# Altium PCB ACS_2.PcbDoc
Units mm, origin at the board's own origin, x right, y up, seen from the top; angles counter-clockwise.
Board outline 90.17 x 95.89 mm, 4 copper layers (Top Layer, Signal Layer 1, Internal Plane 3, Bottom Layer), stack 1.568 mm thick; 51 components, 46 nets, 340 pads, 42 vias.
Unrouted connection lines stored in the file: 6.
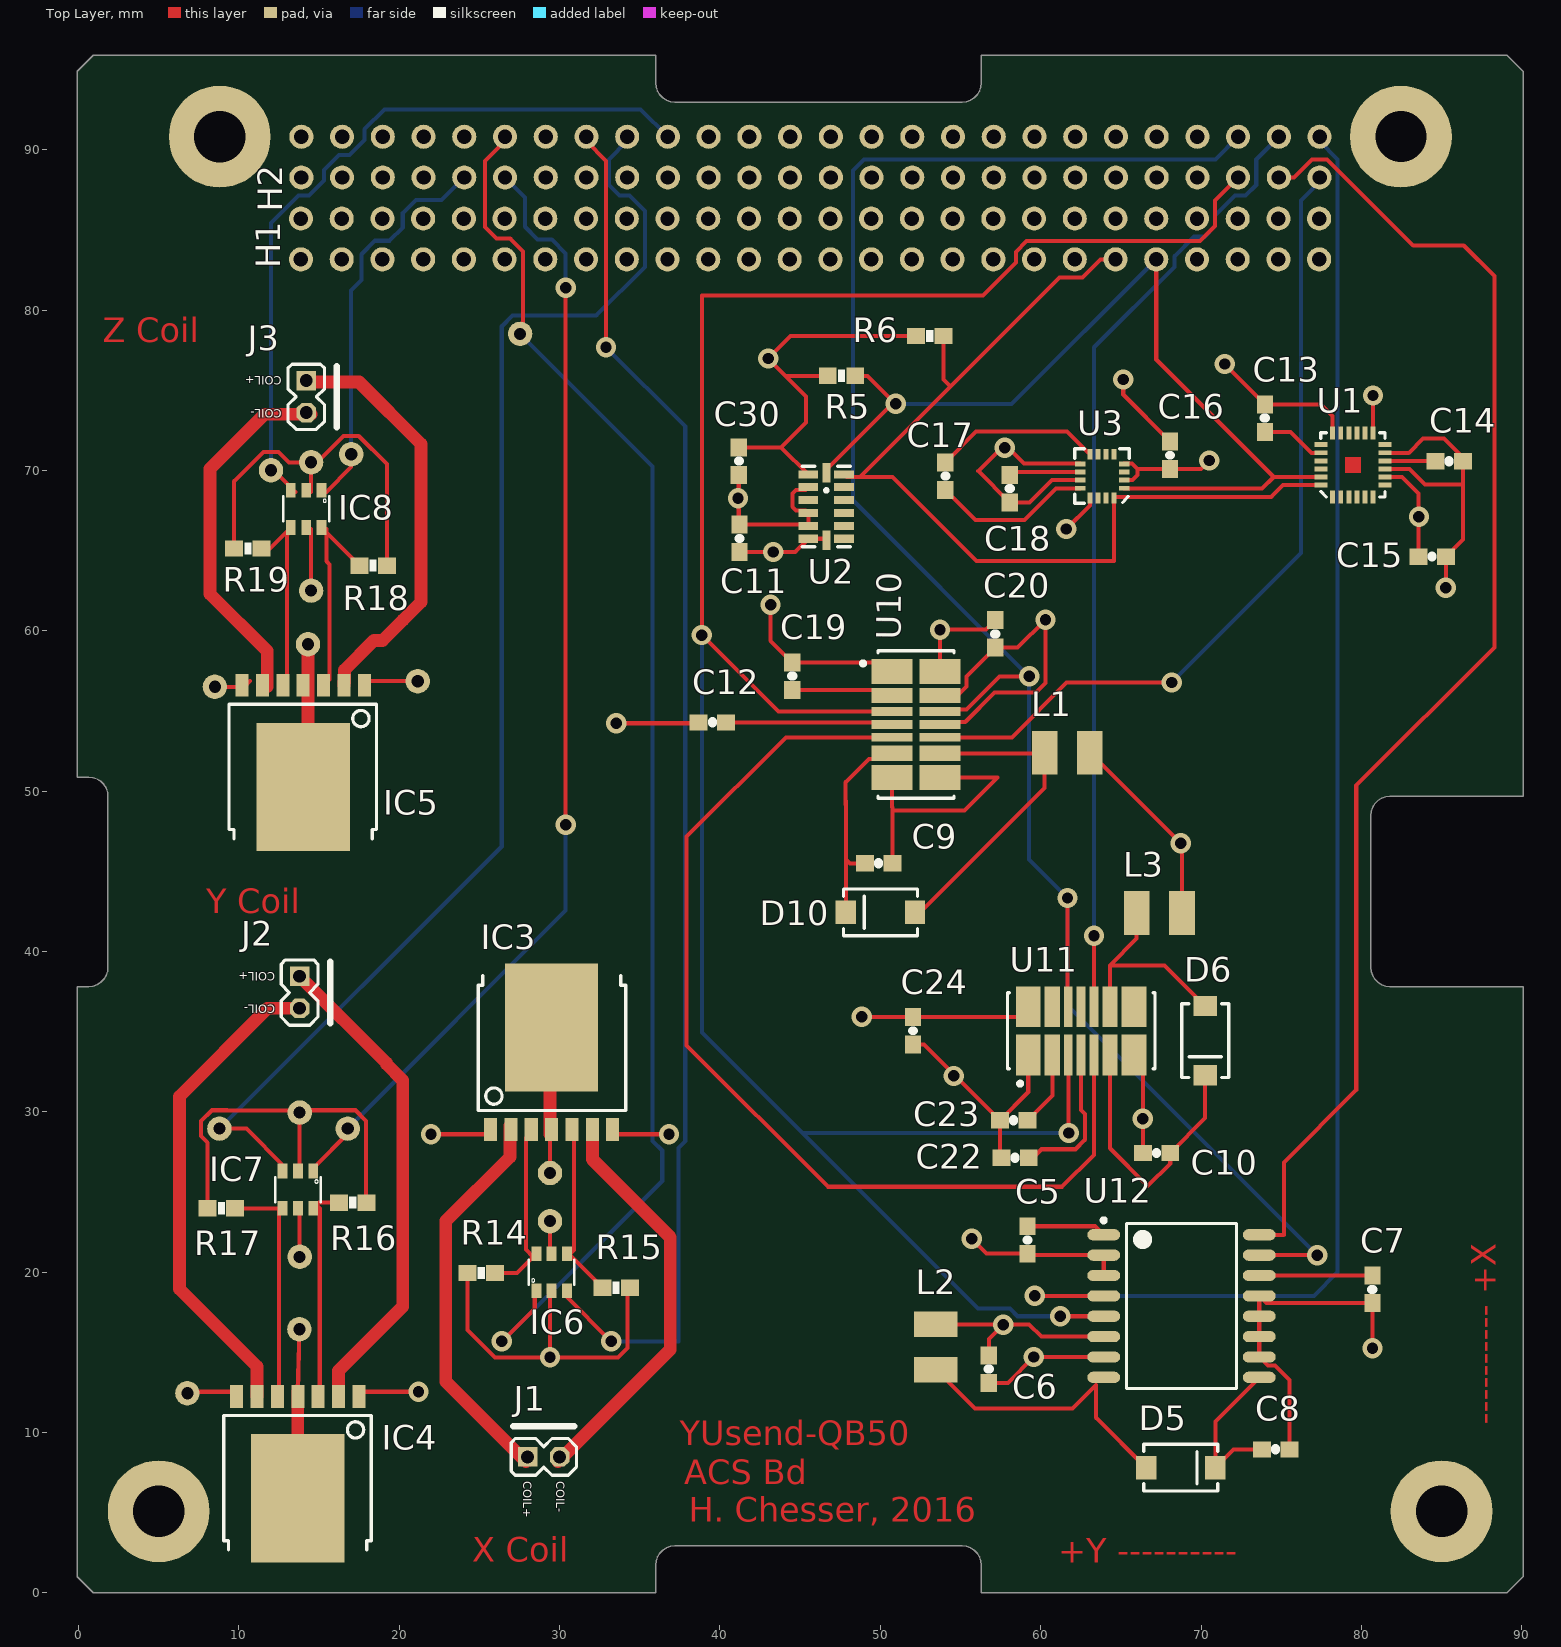
[diagram p0: Top Layer view]
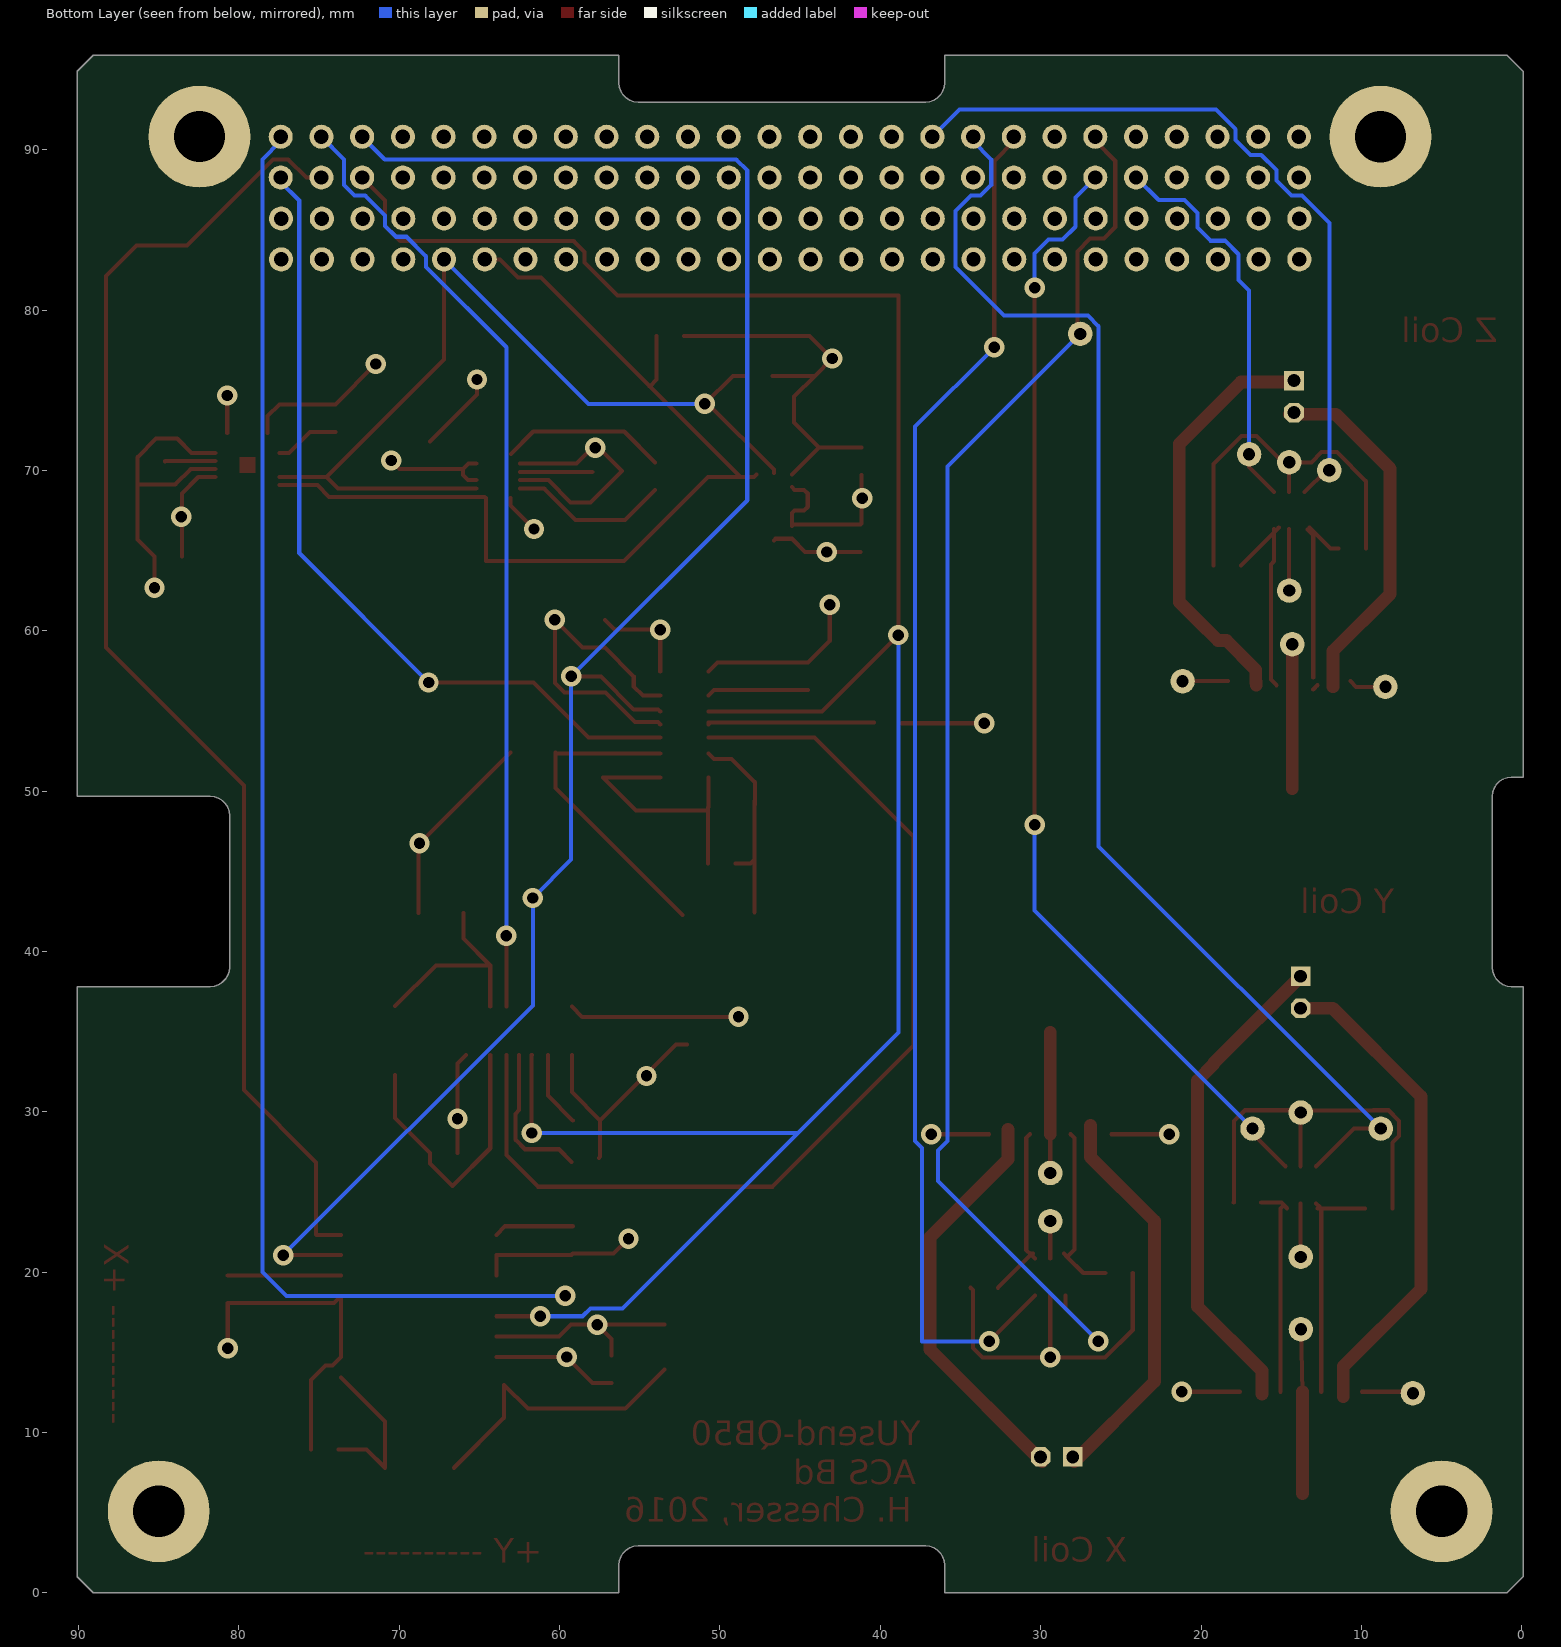
[diagram p1: Bottom Layer view, seen from below]
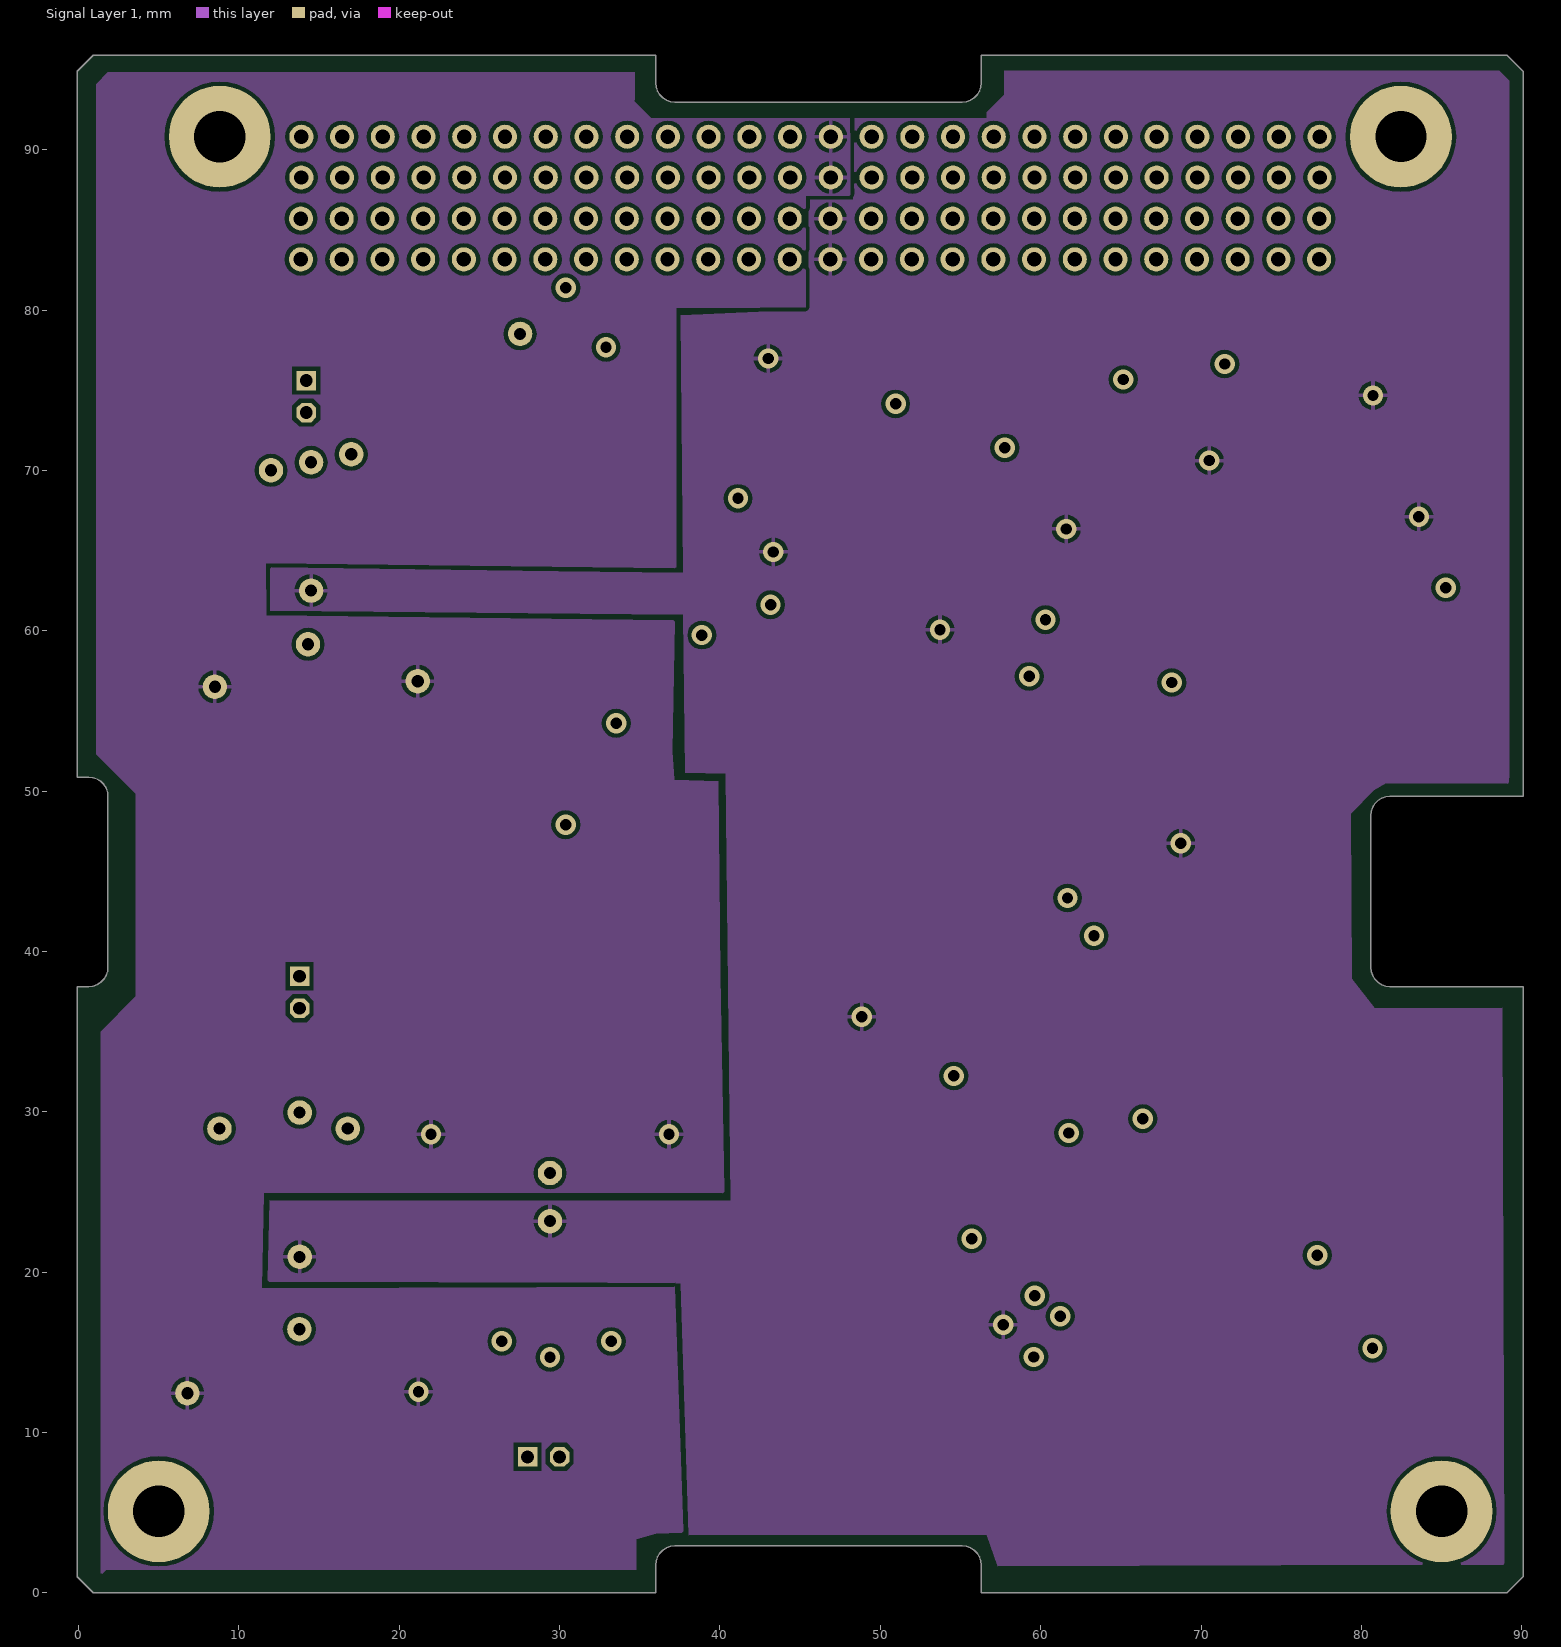
[diagram p2: Signal Layer 1]
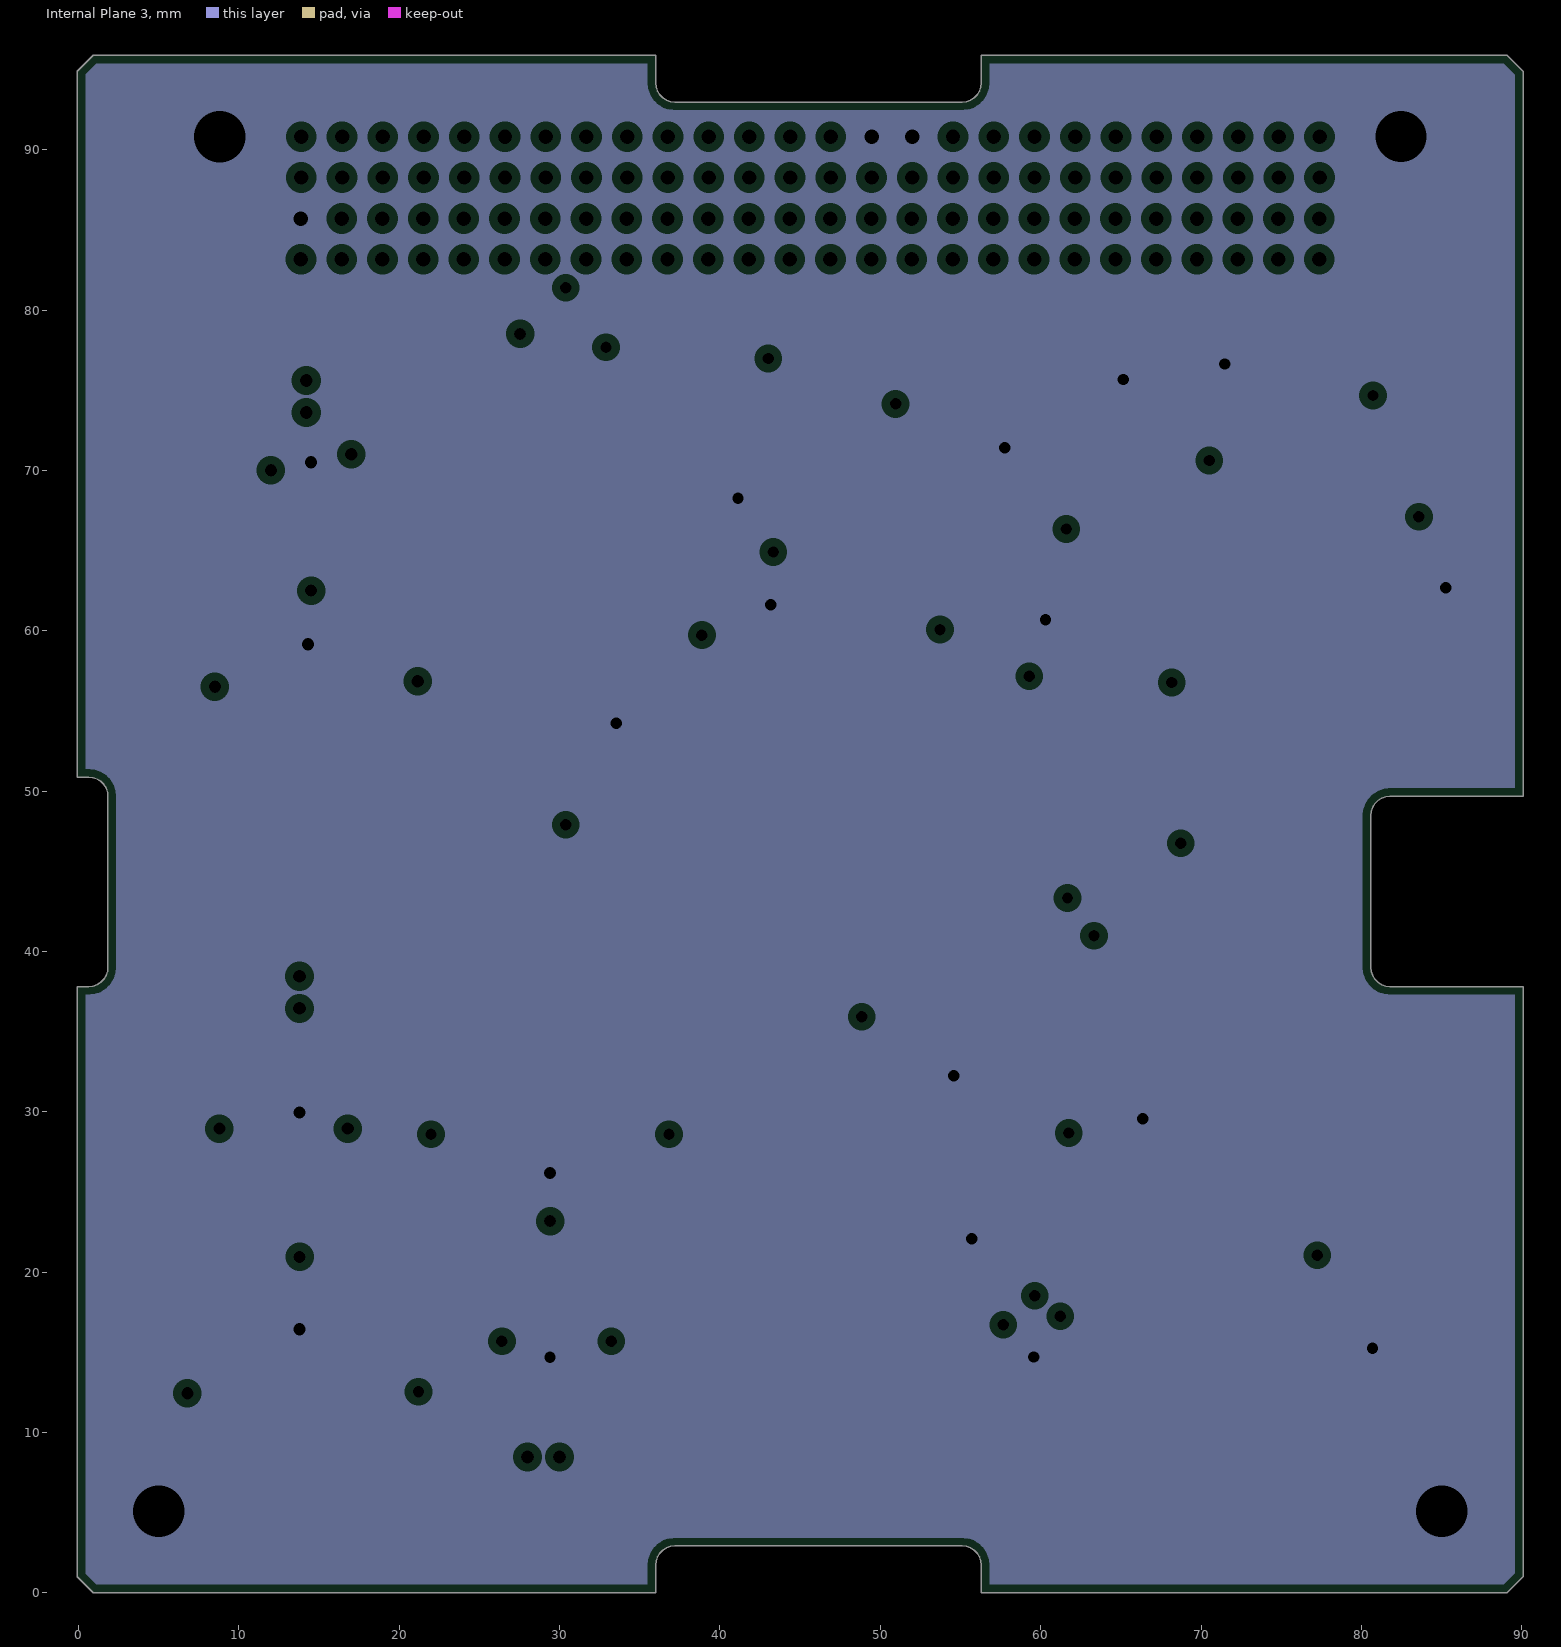
[diagram p3: Internal Plane 3, clearances drawn from the general rule]

## Layer stack, top to bottom
Top Solder: solder mask 0.0102, Solder Resist, Dk 3.5
Top Layer: signal copper 0.0356
Dielectric 1: core 0.475, FR-4, Dk 4.2
Signal Layer 1: signal copper 0.036
Dielectric 3: core 0.475, FR-4, Dk 4.2
Internal Plane 3: plane copper 0.036, net GND
Dielectric 2: core 0.475, FR-4, Dk 4.2
Bottom Layer: signal copper 0.0356
Bottom Solder: solder mask 0.0102, Solder Resist, Dk 3.5

## Board outline
89.085,95.89 56.305,95.89 56.305,94.17 56.275,93.903 56.186,93.649 56.043,93.422 55.853,93.232 55.626,93.089 55.372,93 55.105,92.97 37.185,92.97 36.918,93 36.664,93.089 36.437,93.232 36.247,93.422 36.104,93.649 36.015,93.903 35.985,94.17 35.985,95.89 0.915,95.89 -0.085,94.89 -0.085,50.87 0.635,50.87 0.902,50.84 1.156,50.751 1.383,50.608 1.573,50.418 1.716,50.191 1.805,49.937 1.835,49.67 1.835,39.01 1.805,38.743 1.716,38.489 1.573,38.262 1.383,38.072 1.156,37.929 0.902,37.84 0.635,37.81 -0.085,37.81 -0.085,1 0.915,0 35.985,0 35.985,1.72 36.015,1.987 36.104,2.241 36.247,2.468 36.437,2.658 36.664,2.801 36.918,2.89 37.185,2.92 55.105,2.92 55.372,2.89 55.626,2.801 55.853,2.658 56.043,2.468 56.186,2.241 56.275,1.987 56.305,1.72 56.305,0 89.085,0 90.085,1 90.085,37.81 81.785,37.81 81.518,37.84 81.264,37.929 81.037,38.072 80.847,38.262 80.704,38.489 80.615,38.743 80.585,39.01 80.585,48.47 80.615,48.737 80.704,48.991 80.847,49.218 81.037,49.408 81.264,49.551 81.518,49.64 81.785,49.67 90.085,49.67 90.085,94.89

## Design rules (kind name [scope] priority, off if disabled: settings)
Clearance [All] p1: gap=0.254
PlaneClearance [All] p1: clearance=0.508
PlaneConnect [All] p1: planeconnectstyle=Relief reliefexpansion=0.508 reliefentries=4 reliefconductorwidth=0.254 reliefairgap=0.254
PolygonConnect [All] p1: connectstyle=Relief reliefconductorwidth=0.254 reliefentries=4 polygonreliefangle="90 Angle" airgapwidth=0.254
RoutingVias [All] p1: holewidth=0.711 width=1.27 viastyle="Through Hole" minholewidth=0.711 minwidth=1.27 maxholewidth=0.711 maxwidth=1.27
SolderMaskExpansion [All] p1: expansion=0.102
Width GroundTrace [All] p1: maxlimit=0.254 minlimit=0.254 preferedwidth=0.254
Width CoilTraces [(InNet('DRIVE-XA') OR InNet('DRIVE-XB') OR InNet('DRIVE-YA') OR InNet('DRIVE-YB') OR InNet('DRIVE-ZA') OR InNet('DRIVE-ZB'))] p2: maxlimit=1 minlimit=0.254 preferedwidth=0.8 toplayer_minwidth=0.5 midlayer1_maxwidth=0.254 midlayer1_prefwidth=0.254 bottomlayer_minwidth=0.5 minimp=50.000000 maximp=50.000000 favimp=50.000000
Width [InNet('GND')] p3: maxlimit=0.5 minlimit=0.254 preferedwidth=0.4 midlayer1_maxwidth=0.254 midlayer1_prefwidth=0.254 minimp=50.000000 maximp=50.000000 favimp=50.000000
Width PowerTraces [(InNet('3.3V') AND InNet('5V'))] p4: maxlimit=0.5 minlimit=0.254 preferedwidth=0.4 midlayer1_maxwidth=0.254 midlayer1_prefwidth=0.254 minimp=50.000000 maximp=50.000000 favimp=50.000000
27 further rules are at their usual default settings.

## Classes and differential pairs
net class DIR[2..0]: DIR0 DIR1 DIR2
net class I2C(TWI)[1..0]: I2C(TWI)0 I2C(TWI)1
net class PWM[2..0]: PWM0 PWM1 PWM2

## Components (designator, comment, footprint, x,y, rotation, side; value= is the part's Value field where it differs from the comment)
C5 "1uF" 0603-CAP 59.182,21.996 r90 top
C6 "1uF" 0603-CAP 56.769,13.945 r90 top
C7 "1uF" 0603-CAP 80.696,18.923 r90 top
C8 "100nF" 0603-CAP 74.651,8.941 r0 top
C9 "100nF" 0603-CAP 49.886,45.491 r0 top
C10 "100nF" 0603-CAP 67.234,27.432 r180 top
C11 "0.1uF" 0603-CAP 41.224,65.761 r90 top
C12 "1uF" 0603-CAP 39.522,54.28 r0 top
C13 "2.2nF" 0603-CAP 73.99,73.254 r90 top
C14 "0.1uF" 0603-CAP 85.471,70.561 r0 top
C15 "10nF" 0603-CAP 84.404,64.618 r0 top
C16 "0.1uF" 0603-CAP 68.072,70.942 r90 top
C17 "0.22uF" 0603-CAP 54.051,69.647 r270 top
C18 "<b>Capacitor</b> / Standard SMT, and 0.1\", and 0.2\" leaded ceramic capacitors" 0603-CAP 58.064,68.859 r270 top
C19 "1uF" 0603-CAP 44.501,57.175 r270 top
C20 "1uF" 0603-CAP 57.175,59.792 r90 top
C22 "1uF" 0603-CAP 58.395,27.127 r0 top
C23 "1uF" 0603-CAP 58.318,29.464 r0 top
C24 "1uF" 0603-CAP 52.045,35.052 r90 top
C30 "0.1uF" 0603-CAP 41.173,70.587 r270 top
D5 "<b>Diode</b> / Standard reverse protection diodes and small signal diodes." DIODE-SMA 68.732,7.798 r0 top
D6 "<b>Diode</b> / Standard reverse protection diodes and small signal diodes." DIODE-SMA 70.256,34.442 r270 top
D10 "<b>Diode</b> / Standard reverse protection diodes and small signal diodes." DIODE-SMA 50.013,42.443 r180 top
H1 "ESQ_126_39_G_D" SAMTEC_ESQ_126_39_G_D 13.868,83.16 r90 top
H2 "H2" SAMTEC_ESQ_126_39_G_D 13.894,88.265 r90 top
IC3 "BD621*HFP" HRP7 29.501,33.978 r0 top
IC4 "BD621*HFP" HRP7 13.673,7.16 r180 top
IC5 "BD621*HFP" HRP7 14.01,51.52 r180 top
IC6 "SN74LVC1G18-SOT23" SOT23-6 29.501,19.978 r0 top
IC7 "SN74LVC1G18-SOT23" SOT23-6 13.687,25.15 r180 top
IC8 "SN74LVC1G18-SOT23" SOT23-6 14.2,67.6 r180 top
J1 "PINHD-1X2-COIL" HEADER-1X2-COIL 28.001,8.478 r0 top
J2 "PINHD-1X2-COIL" HEADER-1X2-COIL 13.787,38.45 r270 top
J3 "PINHD-1X2-COIL" HEADER-1X2-COIL 14.2,75.6 r270 top
L1 "<b>Inductors</b>" 1210 61.671,52.4 r180 top
L2 "<b>Inductors</b>" 1210 53.467,15.342 r270 top
L3 "<b>Inductors</b>" 1210 67.412,42.393 r180 top
R5 "4.7k" 0603-RES 47.574,75.895 r0 top
R6 "4.7k" 0603-RES 53.086,78.384 r0 top
R14 "4.7k" 0603-RES 25.121,19.939 r180 top
R15 "4.7k" 0603-RES 33.514,19.025 r0 top
R16 "4.7k" 0603-RES 17.094,24.333 r0 top
R17 "4.7k" 0603-RES 8.915,23.978 r180 top
R18 "4.7k" 0603-RES 18.364,64.059 r0 top
R19 "4.7k" 0603-RES 10.566,65.126 r180 top
U1 "ITG-3200" QFN-24 79.477,70.333 r90 top
U2 "ADXL345" LGA14 46.634,67.734 r90 top
U3 "HMC5883LSMD" 16LPCC 63.83,69.647 r180 top
U10 "ADXRS453BEYZ" ADI-EY-14-1_V 52.222,54.153 r270 top
U11 "ADXRS453BEYZ" ADI-EY-14-1_V 62.525,35.051 r0 top
U12 "ADXRS453BRGZ" ADI-RG-16-1_M 68.783,17.882 r0 top

## Footprints (in the part's own frame and the unit in brackets; to place one, negate y for a bottom-side part, rotate by r counter-clockwise, add the part's x,y. Pads: shape width x height; smd on the part's side, far side on the other; paste and mask are expansions set on the pad)
16LPCC [mil]
  rect 26x12 smd: 1(-53.94,30) 2(-53.94,10) 3(-53.94,-9.84) 4(-53.94,-29.53) 9(54,-29.53) 10(54,-9.84) 11(54,10) 12(54,30)
  rect 12x26 smd: 5(-29.53,-53.94) 6(-9.84,-53.94) 7(10,-53.94) 8(30,-53.94) 13(30,54) 14(10,54) 15(-9.84,54) 16(-29.53,54)
  silkscreen extent -67,-67 67,67
0603-CAP [mil]
  rect 44x40 smd: 1(-33.46,0) 2(34,0)
  silkscreen extent 0,-1 0,2
0603-RES [mil]
  rect 44x40 smd: 1(-33.46,0) 2(34,0)
  silkscreen extent -9,-15 9,15
1210 [mil]
  rect 63x107 smd: 1(-55.12,0) 2(56,0)
ADI-EY-14-1_V [mm] "LCC, 14-Leads, Body 4x9mm"
  rect 1.55x2.55 smd: 1(-3.3,-1.5) 7(3.3,-1.5) 8(3.3,1.5) 14(-3.3,1.5)
  rect 0.95x2.55 smd: 2(-1.8,-1.5) 6(1.8,-1.5) 9(1.8,1.5) 13(-1.8,1.5)
  rect 0.55x2.55 smd: 3(-0.8,-1.5) 4(0,-1.5) 5(0.8,-1.5) 10(0.8,1.5) 11(0,1.5) 12(-0.8,1.5)
  silkscreen extent -4.6,-3.43 4.6,2.37, body extent -4.5,-2.29 4.5,2.16, height 9.15
ADI-RG-16-1_M [mm] "SOIC, 16-Leads, Body 10.3x7.8mm, Pitch 1.27mm, IPC Low Density"
  oval 2.05x0.7 smd: 1(-4.85,4.445) 2(-4.85,3.175) 3(-4.85,1.905) 4(-4.85,0.635) 5(-4.85,-0.635) 6(-4.85,-1.905) 7(-4.85,-3.175) 8(-4.85,-4.445) 9(4.85,-4.445) 10(4.85,-3.175) 11(4.85,-1.905) 12(4.85,-0.635) 13(4.85,0.635) 14(4.85,1.905) 15(4.85,3.175) 16(4.85,4.445)
  silkscreen extent -4.97,-5.15 3.42,5.47, body extent -3.9,-5.15 3.9,5.15, height 3.73
DIODE-SMA [mil]
  rect 50x58 smd: A(-84.65,0) C(85,0)
  silkscreen extent -91,-57 91,58
HEADER-1X2-COIL [mm]
  rect 1.22x1.22 hole 0.8: 1(0,0)
  oct 1.22x1.22 hole 0.8: 2(2,0)
  silkscreen extent -1.02,-1.14 3.05,1.91, body extent -2.87,-2.65 4.83,2.9, height 8.51
HRP7 [mil]
  rect 32x56 smd: 1(-150,-200) 2(-100,-200) 3(-50,-200) 4(0,-200) 5(50,-200) 6(100,-200) 7(150,-200)
  rect 229x315 smd: P(0,50)
  silkscreen extent -180,-154 182,177
LGA14 [mil]
  rect 20x48 smd: 1(79,44) 2(48,44) 3(16,44) 4(-15.75,44) 5(-47.24,44) 6(-78.74,44) 8(-78.74,-43.31) 9(-47.24,-43.31) 10(-15.75,-43.31) 11(16,-43.31) 12(48,-43.31) 13(79,-43.31)
  rect 48x20 smd: 7(-82.68,0) 14(83,0)
  silkscreen extent -98,-59 99,60
QFN-24 [mil]
  rect 32x12 smd: 1(-78.74,50) 2(-78.74,30) 3(-78.74,10) 4(-78.74,-9.84) 5(-78.74,-29.53) 6(-78.74,-49.21) 13(79,-49.21) 14(79,-29.53) 15(79,-9.84) 16(79,10) 17(79,30) 18(79,50)
  rect 12x32 smd: 7(-49.21,-78.74) 8(-29.53,-78.74) 9(-9.84,-78.74) 10(10,-78.74) 11(30,-78.74) 12(50,-78.74) 19(50,79) 20(30,79) 21(10,79) 22(-9.84,79) 23(-29.53,79) 24(-49.21,79)
  Top Layer region: -19.68,-19.69 20,-19.69 20,20 -19.68,20
  silkscreen extent -79,-79 79,79
SAMTEC_ESQ_126_39_G_D [mm]
  round 1.5 hole 0.9: 1(0,0) 2(2.54,0) 3(0,-2.54) 4(2.54,-2.54) 5(0,-5.08) 6(2.54,-5.08) 7(0,-7.62) 8(2.54,-7.62) 9(0,-10.16) 10(2.54,-10.16) 11(0,-12.7) 12(2.54,-12.7) 13(0,-15.24) 14(2.54,-15.24) 15(0,-17.78) 16(2.54,-17.78) 17(0,-20.32) 18(2.54,-20.32) 19(0,-22.86) 20(2.54,-22.86) 21(0,-25.4) 22(2.54,-25.4) 23(0,-27.94) 24(2.54,-27.94) 25(0,-30.48) 26(2.54,-30.48) 27(0,-33.02) 28(2.54,-33.02) 29(0,-35.56) 30(2.54,-35.56) 31(0,-38.1) 32(2.54,-38.1) 33(0,-40.64) 34(2.54,-40.64) 35(0,-43.18) 36(2.54,-43.18) 37(0,-45.72) 38(2.54,-45.72) 39(0,-48.26) 40(2.54,-48.26) 41(0,-50.8) 42(2.54,-50.8) 43(0,-53.34) 44(2.54,-53.34) 45(0,-55.88) 46(2.54,-55.88) 47(0,-58.42) 48(2.54,-58.42) 49(0,-60.96) 50(2.54,-60.96) 51(0,-63.5) 52(2.54,-63.5)
  body extent -1.27,-65.02 3.81,1.52, height 11.05
SOT23-6 [mil]
  rect 24x36 smd: 1(-37.4,-45.28) 2(0,-45.28) 3(38,-45.28) 4(38,46) 5(0,46) 6(-37.4,46)
  silkscreen extent -56,-31 56,31

## Part data
C5 C6 C7 C8 C9 C10 C11 C12 C13 C14 C15 C16 C17 C19 C20 C22 C23 C24 C30: library part CAPACITOR-0603, "<b>Capacitor</b> / Standard SMT, and 0.1\", and 0.2\" leaded ceramic capacitors"
C18: library part CAPACITOR-0603
D5 D6 D10: library part DIODE-SMA
H1 H2: library part SAMTEC_ESQ_126_39_G_D, "26X2 header"
IC3: "H-bridge driver for brush motors BD621* have minimum 3V power input, BD62*2 have 2A current rating</p> / Source: http://www.rohm.com/products/databook/motor/pdf/bd623x_series-e.pdf"
IC4 IC5: "<b>H-bridge driver</b> for brush motors / <p>BD621* have minimum 3V power input, BD62*2 have 2A current rating</p> / Source: http://www.rohm.com/products/databook/motor/pdf/bd623x_series-e.pdf"
IC6 IC7 IC8: "<b>1-of-2 Noninverting Demultiplexer with 3-state Deselected Output</b> / <p>Function-Compatible with SN74AUC1G19 Decoder/Demultiplexer (for High Deselected Output)<p>"
L1 L2 L3: library part INDUCTOR-1210_470uH
R5 R6 R14 R15 R16 R17 R18 R19: library part RESISTOR-0603, "<p><b>Resistor</b></p> / Basic schematic elements and footprints for resistors."
U1: "ITG-3200 3-axis gyro, digital output, qfn24 package"
U3: "3 Axis Digital Compass IC"
U10 U11: library part CMP-0885-00107-1, "High Performance, Digital Output Gyroscope with SPI, 77.5 Hz BW, Industrial, 14-pin LCC, Tube"
U12: library part CMP-0885-00109-1, "High Performance, Digital Output Gyroscope with SPI, 77.5 Hz BW, Industrial, 16-pin SOIC, Tube"

## Free pads (board coordinates)
  round 1.524 hole 0.762: 0(14.31,59.15) 0(29.401,23.178) 1(8.5,56.5) 1(29.401,26.178) 2(21.15,56.85) 2(27.534,78.511) 3(14.5,62.5) 4(14.5,70.5) 5(17,71) 6(12,70) 7(13.787,20.95) 8(13.773,16.436) 9(6.787,12.45) 11(13.787,29.95) 12(8.787,28.95) 13(16.787,28.95)
  round 6.35 hole 3.2: 1(4.995,5.08) 1(8.805,90.81) 1(85.005,5.08)
  round 0.5 hole 0.5: 1(13.885,83.19) 1(13.885,88.27)
  round 6.35 hole 3.175: 1(82.465,90.81)

## Via types
v1: diameter 1.27, hole 0.711, Top Layer to Bottom Layer, 42 vias

## Nets (pads, with @x,y where several pads share a name; then routed paths per layer and width w, separated by ;. In a path a pad name is that pad's centre, name@x,y a point inside that pad or via, vN(x,y) a via of type N, cw(c..) or ccw(c..) an arc to the next point about the centre after c; other vN are vias at no path point)
3.3V: C6.2 C11.1 C15.1 C16.1 C20.2 C24.2 C30.1 H1.27 H1.28 IC6.5 IC7.5 IC8.5 L1.1 L2.1 L3.1 pad.0@29.401,23.178 pad.3 pad.7 R5.1 R6.1 U1.8 U1.13 U2.1 U2.6 U2.7 U3.2 U3.4 U3.13 U10.14 U11.14 U12.6 | length 100.7
  Top Layer w0.254: pad.7 IC7.5@13.787,24.281 ; pad.3 IC8.5@14.5,66.332 ; IC6.5@29.401,20.846 pad.0@29.401,23.178 ; C30.1 43.82,71.437 ; C11.1 44.694,64.911 U2.6 46.534,65.734 U2.7 ; U2.1 43.82,71.437 ; R5.1 44.083,75.895 ; v1(48.844,35.916) C24.2 58.59,35.916 U11.14 ; R6.1 44.411,78.384 v1(43.002,76.976) 44.083,75.895 ; L2.1 59.281,16.742 60.046,15.977 U12.6 ; U10.14 v1(53.722,60.07) 56.59,60.07 C20.2 ; C6.2 56.769,15.824 v1(57.658,16.713) ; v1(61.595,66.345) 63.068,67.818 U3.13 ; L1.1 68.812,46.66 L3.1 ; U3.2 65.718,69.393 66.026,69.701 66.026,70.092 ; U3.4@65.2,70.43 65.688,70.43 66.026,70.092 ; v1(70.51,70.612) 69.991,70.092 C16.1 66.026,70.092 ; U1.13 v1(80.727,74.671) ; U1.8 82.537,69.583 83.554,68.565 C15.1 ; 43.82,71.437 45.378,72.994 45.378,74.6 44.083,75.895
  other v1: 68.735,46.736 43.332,64.911 83.591,67.107
5V: H2.27 H2.28 IC3.1 IC3.7 IC4.1 IC4.7 IC5.1 IC5.7 pad.1@8.5,56.5 pad.2@21.15,56.85 pad.9 | length 19.7
  Top Layer w0.254: pad.9@6.877,12.54 IC4.7@9.963,12.54 ; pad.1@8.5,56.5 10.34,56.5 10.69,56.85 ; IC4.1@17.583,12.54 v1(21.197,12.54) v1@21.287,12.45 ; 18.31,56.85 21.15,56.85 pad.2@21.5,56.5 ; v1(21.981,28.598) IC3.1@25.591,28.598 ; IC3.7@33.211,28.598 v1(36.821,28.598)
CS-X: H2.50 U11.10 | length 59.8
  Top Layer w0.254: U11.10 v1(63.325,40.967)
  Bottom Layer w0.254: v1(63.325,40.967) 63.325,77.677 68.339,82.691 68.339,83.35 69.558,84.569 70.217,84.569 70.879,85.231 70.879,85.89 72.123,87.134 72.782,87.134 73.445,87.797 73.445,89.396 H2.50
CS-Y: H2.51 U10.10 | length 51.2
  Top Layer w0.254: U10.10 58.204,53.353 61.62,56.769 v1(68.174,56.769)
  Bottom Layer w0.254: v1(68.174,56.769) 76.237,64.833 76.237,86.831 77.394,87.987 H2.51
CS-Z: H2.52 U12.4 | length 95.1
  Top Layer w0.254: v1(59.639,18.517) U12.4
  Bottom Layer w0.254: v1(59.639,18.517) 77.038,18.517 78.525,20.003 78.525,89.396 77.394,90.527 H2.52
DIR0: H2.12 IC6.1 pad.2@27.534,78.511 | length 88.6
  Top Layer w0.254: v1(26.401,15.678) 28.451,17.728 IC6.1@28.451,18.528 ; H2.12@26.585,90.81 26.585,90.532 25.349,89.296 25.349,85.166 26.06,84.455 26.919,84.455 27.716,83.658 pad.2@27.716,78.511
  Bottom Layer w0.254: v1(26.401,15.678) 36.401,25.678 36.401,27.581 35.805,28.177 35.805,70.24 pad.2@27.534,78.511
DIR1: H2.11 IC7.1 pad.13 | length 70.2
  Top Layer w0.254: IC7.1@14.737,26.6 16.787,28.65 pad.13 ; v1(30.378,47.904) v1(30.378,81.382)
  Bottom Layer w0.254: pad.13 30.378,42.542 v1(30.378,47.904) ; H2.11@26.585,88.27 27.838,87.017 27.838,85.192 28.626,84.404 29.51,84.404 30.378,83.536 v1(30.378,81.382)
DIR2: H2.9 IC8.1 pad.5 | length 24.6
  Top Layer w0.254: IC8.1@15.45,68.65 17,70.2 pad.5
  Bottom Layer w0.254: pad.5 17,81.225 17.653,81.878 17.653,83.477 18.497,84.321 19.399,84.321 20.218,85.141 20.218,86.043 21.037,86.861 22.636,86.861 H2.9@24.045,88.27
DRIVE-XA: IC3.2 J1.1 | length 24.7
  Top Layer w0.8: IC3.2@26.901,29.138 26.901,27.178 22.901,23.178 22.901,13.178 J1.1@27.901,8.178
DRIVE-XB: IC3.6 J1.2 | length 25.6
  Top Layer w0.8: J1.2@29.901,8.178 36.901,15.178 36.901,22.178 32.041,27.038 IC3.6
DRIVE-YA: IC4.2 J2.1 | length 30.4
  Top Layer w0.8: J2.1 19.202,33.034 19.202,32.969 20.218,31.953 20.218,17.856 16.205,13.843 IC4.2@16.205,12.394
DRIVE-YB: IC4.6 J2.2 | length 31.3
  Top Layer w0.254: IC4.6@11.287,12.086 IC4.6@11.287,12.95
  Top Layer w0.8: IC4.6@11.125,12.247 11.125,14.111 6.287,18.95 6.287,30.95 11.787,36.45 J2.2
DRIVE-ZA: IC5.2 J3.1 | length 25.9
  Top Layer w0.8: J3.1@14.5,75.5 17.5,75.5 21.361,71.639 21.361,61.798 20.234,60.67 18.948,59.385 18.415,59.385 16.586,57.556 16.586,56.764 16.55,56.8 IC5.2
DRIVE-ZB: IC5.6 J3.2 | length 22.8
  Top Layer w0.8: IC5.6@11.77,56.5 11.77,58.73 8.204,62.296 8.204,70.104 11.6,73.5 J3.2@14.5,73.5
GND: C5.1 C6.1 C7.1 C8.2 C9.2 C10.2 C11.2 C12.1 C13.2 C14.2 C15.2 C16.2 C18.2 C19.1 C20.1 C22.1 C23.1 C24.1 C30.2 H1.2 H2.30 H2.32 IC3.4 IC3.P IC4.4 IC4.P IC5.4 IC5.P IC6.2 IC7.2 IC8.2 pad.0@14.31,59.15 pad.1@4.995,5.08 pad.1@8.805,90.81 pad.1@29.401,26.178 pad.1@82.465,90.81 pad.1@85.005,5.08 pad.4 pad.8 pad.11 R14.2 R15.2 R16.2 R17.2 R18.2 R19.2 U1.1 U1.9 U1.11 U1.18 U2.2 U2.4 U2.5 U2.12 U3.9 U3.11 U10.1 U10.7 U10.8 U10.11 U10.13 U11.1 U11.7 U11.8 U11.11 U11.13 U12.2 U12.3 U12.7 U12.10 U12.11 U12.12 U12.13 | length 271.8
  Top Layer w0.254: R17.2 8.052,28.068 7.644,28.476 7.644,29.423 8.313,30.093 9.26,30.093 9.279,30.074 13.663,30.074 pad.11 ; R19.2 9.703,69.319 11.527,71.143 12.473,71.143 13.116,70.5 pad.4 ; IC4.4@13.671,12.54 pad.8 ; IC7.2@13.787,26.6 pad.11 ; IC8.2@14.5,68.65 pad.4 ; R16.2 17.93,24.361 17.93,29.423 17.26,30.093 13.93,30.093 pad.11 ; R18.2 19.228,70.389 17.473,72.143 16.527,72.143 14.884,70.5 pad.4 ; R14.2 24.257,16.385 25.98,14.662 29.385,14.662 v1(29.401,14.678) ; IC6.2@29.401,18.528 v1(29.401,14.678) ; pad.1@29.401,26.178 IC3.4@29.401,28.598 ; v1(33.528,54.229) C12.1@38.672,54.229 ; R15.2 34.232,18.879 34.232,15.257 33.637,14.662 29.417,14.662 v1(29.401,14.678) ; C30.2 41.173,66.675 C11.2 45.426,66.624 U2.5 U2.4 45.345,67.505 44.749,67.505 44.526,67.728 44.526,68.552 44.749,68.775 45.339,68.775 U2.2 ; v1(43.155,61.62) 43.155,59.372 C19.1 50.15,58.025 U10.1 ; U10.7 50.722,48.997 50.749,48.97 50.749,48.795 ; C9.2 50.749,48.795 ; C24.1 52.73,34.202 C23.1 ; U10.8 57.3,50.853 55.242,48.795 50.749,48.795 ; U10.11 53.866,54.297 55.297,54.297 57.134,56.134 59.704,56.134 60.3,56.729 v1(60.3,60.681) 58.561,58.942 C20.1 55.378,57.145 55.378,56.52 54.811,55.953 U10.13 ; v1(55.702,22.073) 56.628,21.146 C5.1 59.272,21.057 U12.2 U12.3 ; C6.1 57.951,13.095 v1(59.563,14.707) U12.7 ; C22.1 57.468,27.203 C23.1 ; U11.1 59.225,31.221 C23.1 ; U3.11@62.459,69.387 60.706,69.387 59.315,67.996 C18.2 56.109,69.952 57.556,71.399 57.98,71.399 58.949,70.43 U3.9@62.459,70.43 ; v1(65.151,75.667) 65.151,74.727 C16.2 ; U11.7 66.37,33.006 C10.2 ; v1(71.476,76.632) C13.2 77.47,74.117 78.207,73.381 U1.18 ; C8.2 75.514,13.264 74.611,14.168 74.172,14.168 U12.10 U12.11 U12.12 U12.13 74.077,18.073 C7.1 v1(80.696,15.24) ; U1.9 83.003,70.083 83.972,69.113 86.335,69.113 ; U1.11 82.956,71.095 83.845,71.984 85.166,71.984 86.335,70.815 C14.2 86.335,69.113 ; v1@85.268,62.56 C15.2 86.335,65.684 86.335,69.113
  Top Layer w0.8: IC4.P@13.671,6.19 IC4.4@13.671,12.54 ; IC5.P@14.31,50.15 pad.0@14.31,59.15 ; IC3.4@29.401,28.598 IC3.P@29.401,34.948
  other v1: 66.37,29.566 54.585,32.233 85.268,62.687 41.123,68.25 57.768,71.399
I2C(TWI)_0: H1.41 R6.2 U1.24 U2.13 U3.16 | length 61.1
  Top Layer w0.254: U2.13 47.887,69.588 50.757,69.588 55.995,64.35 64.58,64.35 U3.16 ; 48.725,69.588 54.377,75.239 ; R6.2 53.95,75.667 54.377,75.239 ; U3.16@64.614,68.275 64.69,68.351 74.378,68.351 75.109,69.083 U1.24 ; H1.41 63.728,83.16 62.597,82.029 61.166,82.029 54.377,75.239
I2C(TWI)_1: H1.43 R5.2 U1.23 U2.14 U3.1 | length 58.6
  Top Layer w0.254: U2.14 46.634,70.043 50.734,74.143 v1(50.952,74.143) 49.2,75.895 R5.2 ; U3.1@65.2,68.859 73.812,68.859 74.536,69.583 ; H1.43 67.208,76.91 74.536,69.583 ; U1.23 74.536,69.583
  Bottom Layer w0.254: v1(50.952,74.143) 58.191,74.143 H1.43
MISO: H2.47 U10.3 U11.3 U12.5 | length 151.5
  Top Layer w0.254: U10.3 43.65,54.953 v1(38.875,59.728) 38.875,80.912 56.4,80.912 58.457,82.969 58.457,83.628 59.12,84.291 69.939,84.291 70.879,85.231 70.879,86.831 H2.47 ; v1(61.214,17.247) U12.5 ; U11.3 61.747,33.529 v1(61.747,28.677)
  Bottom Layer w0.254: v1(38.875,59.728) 38.875,34.938 45.136,28.677 ; v1(61.214,17.247) 58.561,17.247 58.079,17.729 56.083,17.729 45.136,28.677 ; v1(61.747,28.677) 45.136,28.677
MOSI: H2.48 U10.12 U11.12 U12.15 | length 121.4
  Top Layer w0.254: U10.12 53.866,55.097 55.378,55.097 57.432,57.15 v1(59.284,57.15) ; v1(61.671,43.332) 61.671,36.605 U11.12 ; U12.15 v1(77.241,21.057)
  Bottom Layer w0.254: H2.48 70.905,89.396 48.985,89.396 48.297,88.708 48.297,68.136 v1(59.284,57.15) 59.284,45.72 v1(61.671,43.332) 61.671,36.627 v1(77.241,21.057)
NetC5_2: C5.2 U12.1 | length 5
  Top Layer w0.254: C5.2 63.4,22.86 U12.1
NetC7_2: C7.2 U12.14 | length 7.1
  Top Layer w0.254: U12.14 C7.2
NetC8_1: C8.1 D5.C U12.9 | length 10.2
  Top Layer w0.254: U12.9 70.891,10.695 D5.C 72.034,8.941 C8.1
NetC9_1: C9.1 D10.C U10.6 | length 13.2
  Top Layer w0.254: 47.828,49.174 47.828,50.547 49.29,52.009 50.378,52.009 U10.6 ; D10.C 47.854,45.745 ; 47.854,49.385 47.854,45.745 ; C9.1 48.108,45.491 47.854,45.745
NetC10_1: C10.1 D6.C U11.6 | length 17.5
  Top Layer w0.254: U11.6 64.325,27.724 66.675,25.375 68.084,26.783 C10.1 70.256,29.605 D6.C
NetC12_2: C12.2 U10.4 | length 10.4
  Top Layer w0.254: C12.2 U10.4@50.722,54.28 ; U10.4@50.646,54.229 U10.4
NetC13_1: C13.1 U1.20 | length 4
  Top Layer w0.254: C13.1 75.571,72.404 76.88,71.095 U1.20
NetC14_1: C14.1 U1.10 | length 3.2
  Top Layer w0.254: U1.10 84.596,70.587 C14.1
NetC17_1: C17.1 U3.8 | length 10.4
  Top Layer w0.254: C17.1 55.97,72.415 61.644,72.415 U3.8@63.043,71.017
NetC17_2: C17.2 U3.12 | length 10
  Top Layer w0.254: C17.2 55.931,66.904 59.004,66.904 60.96,68.859 U3.12@62.459,68.859
NetC18_1: C18.1 U3.10 | length 4.5
  Top Layer w0.254: C18.1@57.963,69.895 U3.10
NetC19_2: C19.2 U10.2 | length 6.4
  Top Layer w0.254: C19.2 44.516,56.297 50.378,56.297 U10.2
NetC22_2: C22.2 U11.4 | length 9.5
  Top Layer w0.254: C22.2@59.258,26.873 60.046,27.661 62.168,27.661 62.763,28.256 62.763,29.87 62.525,30.108 U11.4
NetC23_2: C23.2 U11.2 | length 4.7
  Top Layer w0.254: C23.2 60.725,31.007 U11.2
NetIC3_3: IC3.3 IC6.6 R14.1 | length 11
  Top Layer w0.254: R14.1 27.343,19.939 IC6.6@28.351,20.946 ; IC3.3@28.131,28.598 27.901,28.368 27.901,21.396 IC6.6@28.351,20.946 ; IC6.6 IC6.6@28.351,20.946
NetIC3_5: IC3.5 IC6.4 R15.1 | length 11.1
  Top Layer w0.254: IC6.4@30.366,20.846 IC6.4@30.604,21.085 ; IC6.4 30.543,21.146 IC6.4@30.604,21.085 ; IC3.5@30.671,28.598 30.901,28.368 30.901,21.381 IC6.4@30.604,21.085 ; R15.1 IC6.4@30.604,21.085
NetIC4_3: IC4.3 IC7.6 R16.1 | length 13.5
  Top Layer w0.254: IC7.6 IC7.6@14.837,24.181 ; IC4.3@15.043,12.54 15.043,23.975 IC7.6@14.837,24.181 ; R16.1 14.988,24.333 IC7.6@14.837,24.181
NetIC4_5: IC4.5 IC7.4 R17.1 | length 14.7
  Top Layer w0.254: R17.1 IC7.4@12.518,23.978 ; IC4.5@12.503,12.54 12.503,23.963 IC7.4@12.518,23.978 ; IC7.4@12.621,24.081 IC7.4@12.821,24.281 ; IC7.4 12.718,23.978 IC7.4@12.518,23.978
NetIC5_3: IC5.3 IC8.6 R18.1 | length 13.3
  Top Layer w0.254: IC8.6 IC8.6@15.45,66.132 ; IC5.3 15.643,56.963 15.643,64.139 15.45,64.332 IC8.6@15.45,66.132 ; IC8.6@15.45,66.332 IC8.6@15.45,66.132 ; R18.1 17.514,64.067 IC8.6@15.45,66.132
NetIC5_5: IC5.5 IC8.4 R19.1 | length 12.1
  Top Layer w0.254: R19.1 11.929,65.126 IC8.4 ; IC5.5 IC5.5@13,56.34 ; IC5.5@13,57.08 13,65.975 IC8.4@13.346,66.32
PWM0: H2.16 IC6.3 | length 86.1
  Top Layer w0.254: IC6.3@30.366,18.528 v1(33.216,15.678) ; H2.16@31.665,90.81 31.665,90.532 32.893,89.304 v1(32.893,77.673)
  Bottom Layer w0.254: v1(32.893,77.673) 37.837,72.729 37.837,28.177 37.401,27.741 37.401,15.678 v1(33.216,15.678)
PWM1: H2.18 IC7.3 pad.12 | length 82.7
  Top Layer w0.254: pad.12 10.471,28.95 IC7.3@12.821,26.6
  Bottom Layer w0.254: pad.12 26.391,46.554 26.391,78.985 27.06,79.654 32.283,79.654 35.319,82.691 35.319,86.168 34.353,87.134 33.745,87.134 33.083,87.797 33.083,89.396 34.214,90.527 H2.18 ; H2.18@34.205,90.805 H2.18@34.205,90.81
PWM2: H2.20 IC8.3 pad.6 | length 46.7
  Top Layer w0.254: pad.6 12.185,70 IC8.3@13.535,68.65
  Bottom Layer w0.254: pad.6 12,85.431 13.703,87.134 14.362,87.134 15.303,88.075 15.303,88.733 16.243,89.674 16.902,89.674 17.843,90.615 17.843,91.273 19.069,92.5 35.055,92.5 H2.20@36.745,90.81
SCK: H2.49 U10.5 U11.5 U12.16 | length 148.2
  Top Layer w0.254: U10.5 44.107,53.353 37.922,47.168 37.922,34.138 46.736,25.324 61.341,25.324 63.325,27.308 U11.5 ; U12.16 75.159,22.327 75.184,22.352 75.184,26.848 79.68,31.344 79.68,50.343 88.29,58.953 88.29,82.118 86.385,84.023 83.235,84.023 77.862,89.396 76.925,89.396 75.794,88.265 H2.49
VX-X: D6.A L3.2 U11.9 | length 13.5
  Top Layer w0.254: U11.9 64.325,39.129 ; L3.2 65.989,40.792 64.325,39.129 ; D6.A 67.72,39.129 64.325,39.129
VX-Y: D10.A L1.2 U10.9 | length 19.9
  Top Layer w0.254: D10.A@52.328,42.278 60.249,50.199 L1.2 60.201,52.353 U10.9
VX-Z: D5.A L2.2 U12.8 | length 18.1
  Top Layer w0.254: L2.2 55.905,11.481 61.977,11.481 63.463,12.966 63.463,10.918 D5.A
pads on no net: H1.1 H1.3 H1.4 H1.5 H1.6 H1.7 H1.8 H1.9 H1.10 H1.11 H1.12 H1.13 H1.14 H1.15 H1.16 H1.17 H1.18 H1.19 H1.20 H1.21 H1.22 H1.23 H1.24 H1.25 H1.26 H1.29 H1.30 H1.31 H1.32 H1.33 H1.34 H1.35 H1.36 H1.37 H1.38 H1.39 H1.40 H1.42 H1.44 H1.45 H1.46 H1.47 H1.48 H1.49 H1.50 H1.51 H1.52 H2.1 H2.2 H2.3 H2.4 H2.5 H2.6 H2.7 H2.8 H2.10 H2.13 H2.14 H2.15 H2.17 H2.19 H2.21 H2.22 H2.23 H2.24 H2.25 H2.26 H2.29 H2.31 H2.33 H2.34 H2.35 H2.36 H2.37 H2.38 H2.39 H2.40 H2.41 H2.42 H2.43 H2.44 H2.45 H2.46 U1.2 U1.3 U1.4 U1.5 U1.6 U1.7 U1.12 U1.14 U1.15 U1.16 U1.17 U1.19 U1.21 U1.22 U2.3 U2.8 U2.9 U2.10 U2.11 U3.3 U3.5 U3.6 U3.7 U3.14 U3.15

## Polygon pours and split planes (outlines as drawn)
3.3V on Signal Layer 1 "Signal Layer 1- 3V3" (solid, pour order 12): 48.412,91.948 48.438,91.973 56.642,91.973 56.642,92.329 57.734,93.421 57.734,94.92 88.595,94.92 89.23,94.285 89.23,50.825 89.205,50.8 89.205,50.47 81.509,50.495 80.772,50.038 79.35,48.59 79.4,38.303 80.848,36.449 88.798,36.474 88.925,1.753 57.328,1.651 56.642,3.632 38.049,3.581 37.567,19.304 11.786,19.406 11.938,24.486 40.665,24.435 40.361,51.079 37.846,51.13 37.719,60.985 11.938,61.239 11.913,63.983 37.719,63.602 37.567,79.68 45.517,80.01 45.542,86.893 48.311,86.868
5V on Signal Layer 1 "Signal Layer 1- 5V" (solid, pour order 8): 48.108,91.948 35.712,91.948 34.62,93.04 34.671,93.091 34.671,94.818 1.829,94.818 1.092,94.082 1.092,52.299 3.556,49.835 3.581,49.835 3.581,37.211 1.372,35.001 1.372,1.219 1.448,1.143 1.727,1.422 34.773,1.422 34.773,3.327 35.992,3.683 37.719,3.734 37.186,19.075 11.43,18.999 11.557,24.943 40.259,24.917 40.03,38.557 39.878,50.597 37.16,50.698 37.033,52.476 37.186,60.655 11.709,60.96 11.684,64.211 37.262,63.881 37.262,80.112 45.339,80.137 45.339,83.744 45.364,87.122 48.133,87.122
GND on Internal Plane 3 (split plane): 401 vertices, not listed, extent 0.425,0.51 89.575,95.38

## Other copper
Top Layer:
  text "Z Coil" at 1.5,78 h1.52
  text "Y Coil" at 7.95,42.393 h1.52
  text "---------- +X" at 88.392,10.465 h1.52 r90
  text "YUsend-QB50" at 37.49,9.195 h1.52 r359.99
  text "ACS Bd" at 37.77,6.782 h1.52 r359.99
  text "H. Chesser, 2016" at 38.049,4.445 h1.52 r359.99
  text "X Coil" at 24.562,1.93 h1.52
  text "+Y ----------" at 61.087,1.88 h1.52

## Text inside footprints (layer, text, board x,y; h text height)
J1: Top Overlay "COIL+" at 27.747,6.954 h0.52 r270; Top Overlay "COIL-" at 29.779,6.954 h0.52 r270
J2: Top Overlay "COIL+" at 12.263,38.704 h0.52 r180; Top Overlay "COIL-" at 12.263,36.672 h0.52 r180
J3: Top Overlay "COIL+" at 12.676,75.854 h0.52 r180; Top Overlay "COIL-" at 12.676,73.822 h0.52 r180
U1: Mechanical 16 "X" at 80.67,71.45 h0.63 r90; Mechanical 16 "Y" at 78.816,69.113 h0.63 r90; Mechanical 16 "Z" at 78.613,70.333 h0.63 r90
U2: Mechanical 16 "X" at 46.888,67.607 h0.47 r90; Mechanical 16 "Y" at 46.888,67.226 h0.47 r90; Mechanical 16 "Z" at 46.507,67.607 h0.47 r90